# Altium PCB Routed BOARD 3.pcbdoc (part 4 of 7)
Units mil, origin at the board's own origin, x right, y up, seen from the top; angles counter-clockwise.
Board outline 6225 x 7025 mil, 8 copper layers (TopLayer, MidLayer1, MidLayer2, MidLayer3, MidLayer4, MidLayer5, MidLayer6, BottomLayer); 253 components, 548 nets, 2588 pads, 2014 vias.
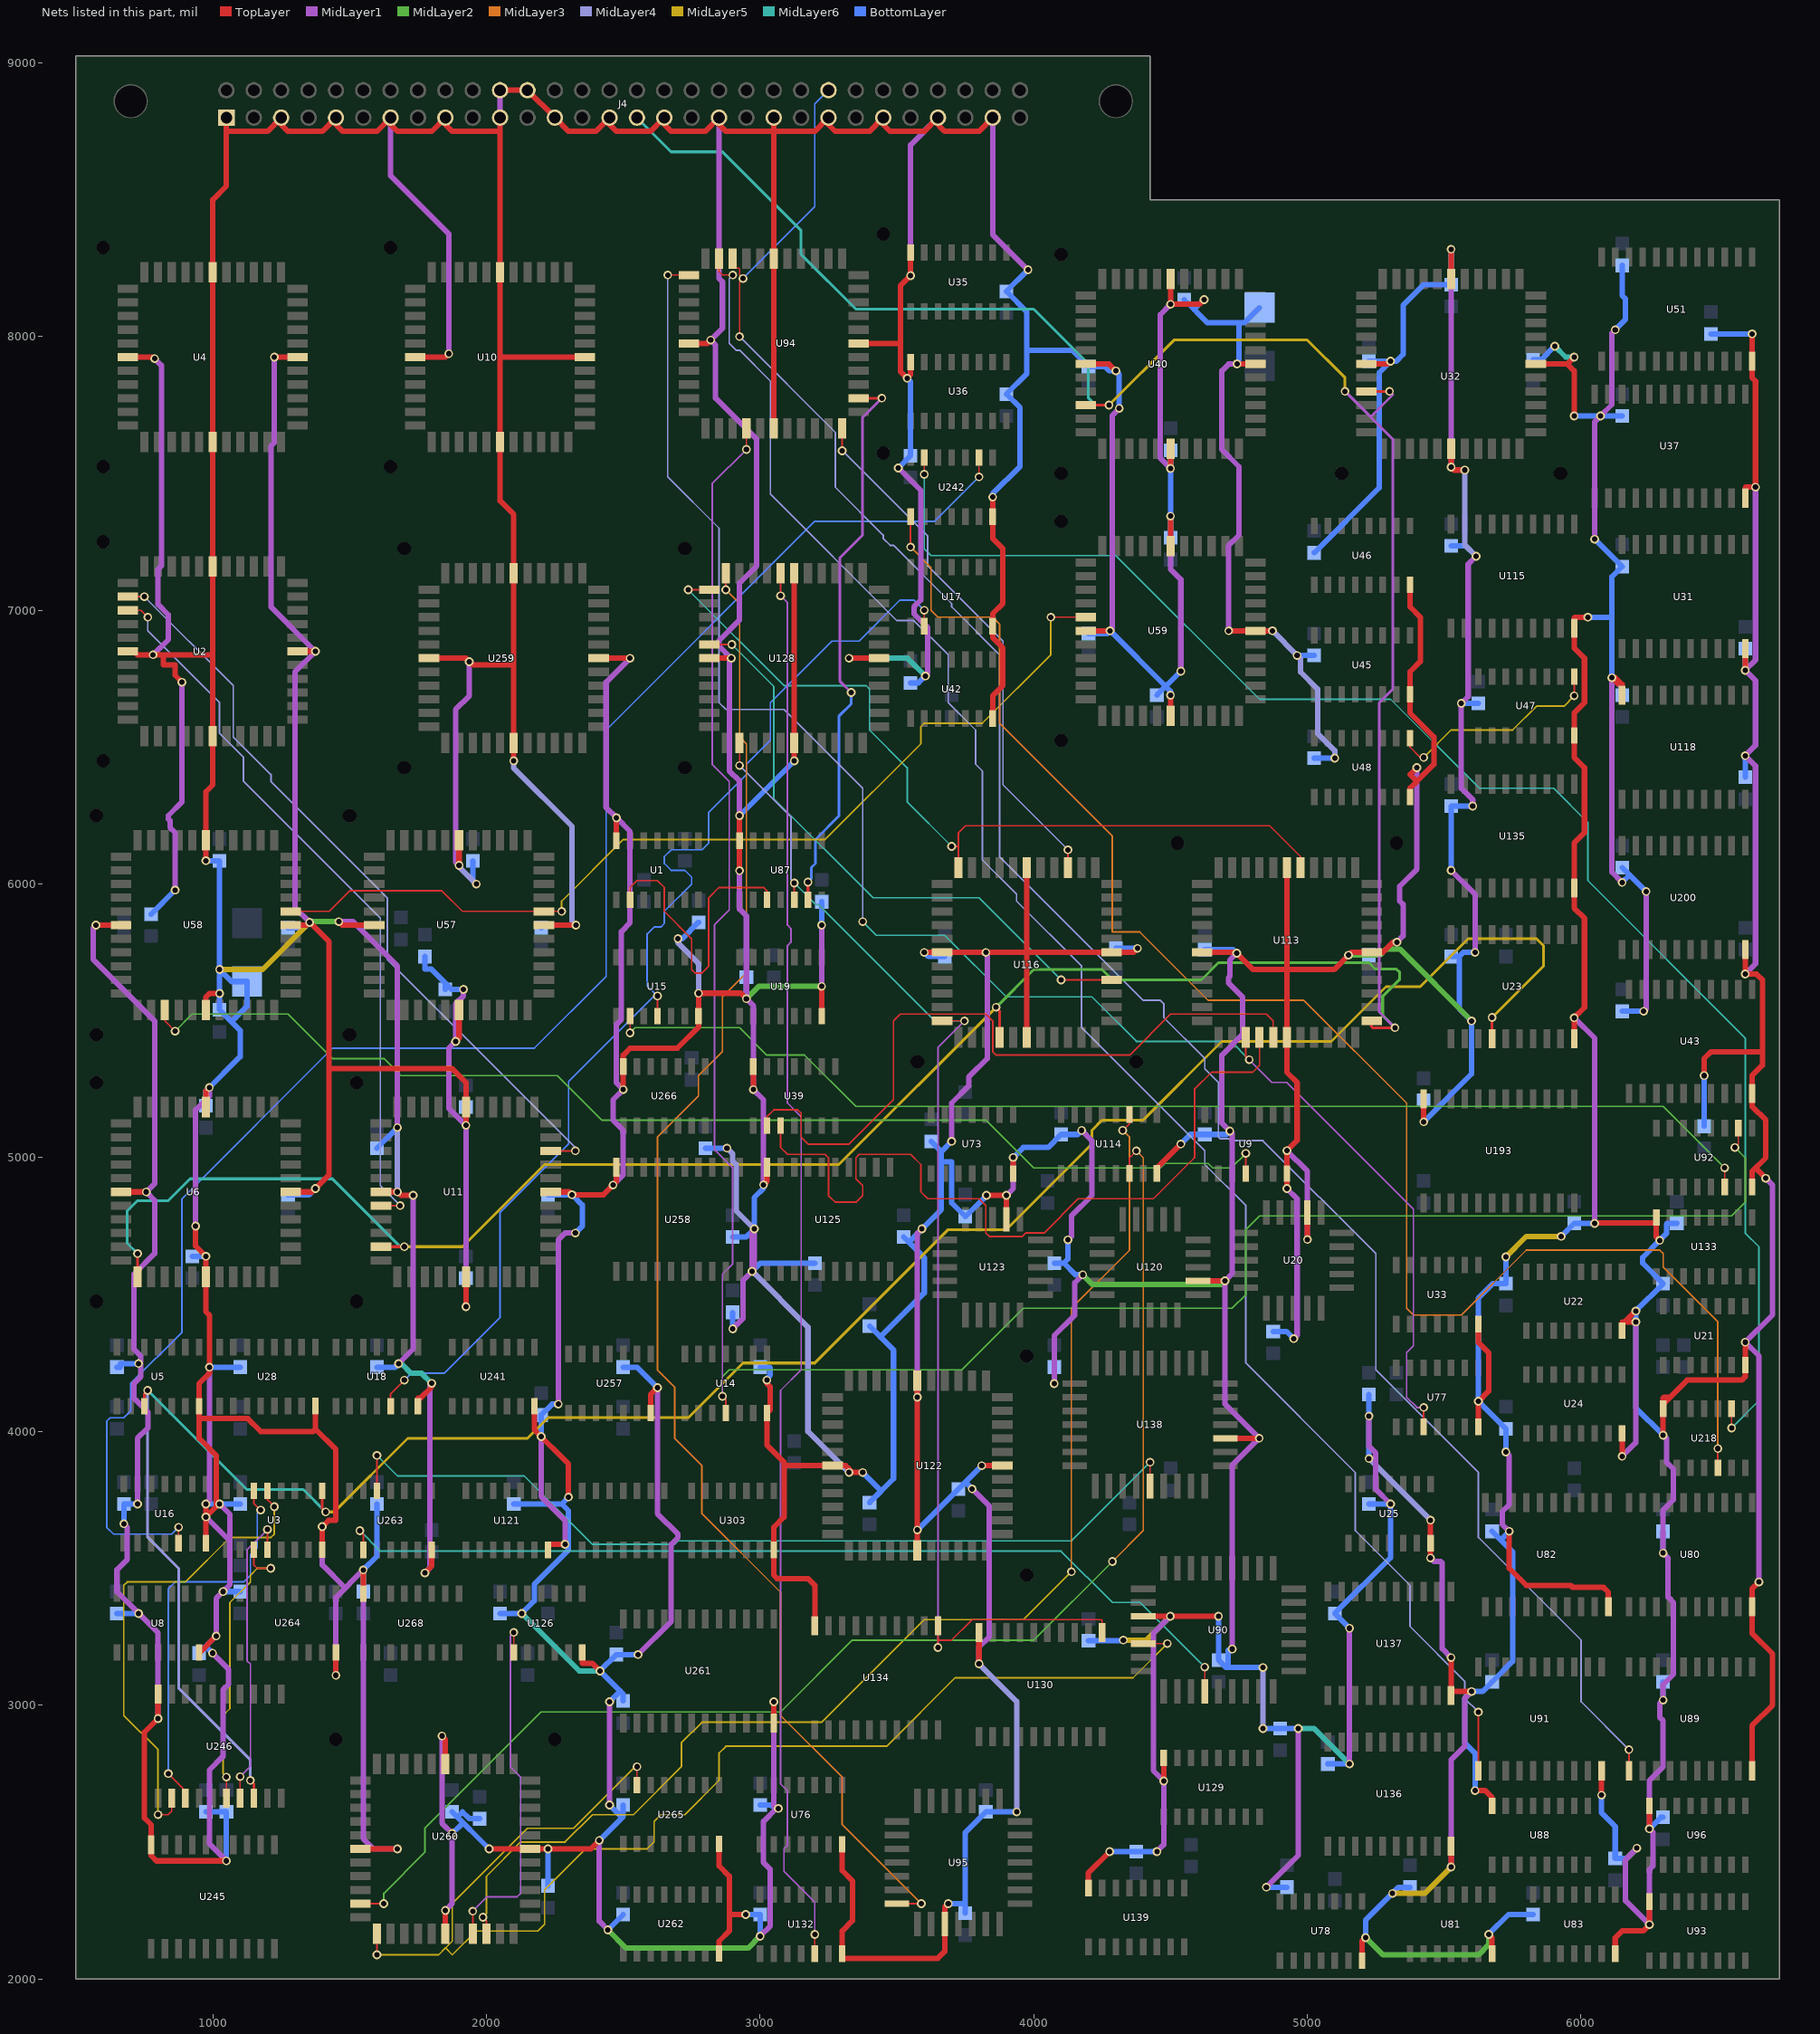
[diagram p10: the nets of this part, all layers, seen from the top]

## Via types
v1: diameter 32, hole 20, TopLayer to BottomLayer, 2014 vias

## Nets (pads, with @x,y where several pads share a name; then routed paths per layer and width w, separated by ;. In a path a pad name is that pad's centre, name@x,y a point inside that pad or via, vN(x,y) a via of type N, cw(c..) or ccw(c..) an arc to the next point about the centre after c; other vN are vias at no path point) (continued)
GND: C18.2 C27.2 C28.2 C29.2 C38.2 C39.2 C45.2 C46.2 C48.2 C50.2 C51.2 C53.2 C55.2 C57.2 C59.2 C60.2 C61.2 C67.2 C70.2 C73.2 C79.2 C80.2 C83.2 C85.2 C88.2 C90.2 C104.2 C106.2 C112.2 C119.2 C123.2 C124.2 C126.2 C127.2 C128.2 C130.2 C134.2 C140.2 C141.2 C143.2 C161.2 C163.2 C164.2 C165.2 C166.2 C167.2 C168.2 C170.2 C173.2 C180.2 C181.2 C186.2 C189.2 C191.2 C192.2 C193.2 C195.1 C196.2 C197.2 C198.2 C202.2 C205.2 C212.2 C213.2 C214.2 C216.2 C223.2 C225.2 C232.2 C241.2 C242.2 C244.2 C249.2 C250.2 C253.2 C254.2 C258.2 C261.2 C262.2 C264.2 C266.2 C267.1 C274.2 C280.2 C282.2 C287.2 C288.2 C291.2 C299.2 J4.1 J4.5 J4.9 J4.13 J4.17 J4.21 J4.22 J4.24 J4.25 J4.29 J4.33 J4.37 J4.41 J4.45 J4.49 J4.53 J4.57 R9.1 R10.1 R11.1 R12.1 R17.2 R30.1 R31.1 R32.1 R33.1 R34.2 R49.1 R62.1 R63.1 R66.1 R67.1 R75.1 R76.1 R77.1 R85.1 R87.1 R97.1 R109.1 R112.1 R115.1 R116.1 R121.1 R123.1 R279.1 R285.1 R288.1 R289.1 U1.7 U2.1 U2.12 U2.23 U2.34 U3.8 U4.1 U4.12 U4.23 U4.34 U5.7 U6.1 U6.12 U6.23 U6.34 U8.7 U9.7 U10.1 U10.12 U10.23 U10.34 U11.1 U11.12 U11.23 U11.34 U14.7 U15.7 U16.7 U17.7 U18.7 U19.7 U20.10 U21.7 U22.8 U23.10 U24.8 U25.7 U28.8 U31.10 U32.1 U32.12 U32.23 U32.34 U33.7 U35.8 U36.8 U37.12 U39.7 U40.1 U40.12 U40.23 U40.34 U42.7 U43.10 U45.8 U46.8 U47.8 U48.8 U51.12 U57.1 U57.12 U57.23 U57.34 U58.1 U58.12 U58.23 U58.34 U59.1 U59.12 U59.23 U59.34 U73.7 U76.7 U77.7 U78.7 U80.10 U81.7 U82.10 U83.7 U87.7 U88.8 U89.10 U90.16 U91.10 U92.8 U93.8 U94.1 U94.12 U94.23 U94.34 U95.14 U96.8 U113.1 U113.12 U113.23 U113.34 U114.8 U115.10 U116.1 U116.12 U116.23 U116.34 U118.10 U120.10 U121.7 U122.1 U122.12 U122.23 U122.34 U123.10 U125.10 U126.7 U128.1 U128.12 U128.23 U128.34 U129.8 U130.10 U132.7 U133.8 U134.10 U135.10 U136.10 U137.10 U138.16 U139.8 U193.12 U200.10 U218.7 U241.7 U242.7 U245.10 U246.10 U257.7 U258.10 U259.1 U259.12 U259.23 U259.34 U260.1 U260.12 U260.23 U260.34 U261.12 U262.8 U263.7 U264.8 U265.8 U266.7 U268.8 U303.7 | length 155108.6
  TopLayer w20: v1(573,5850) U58.34@665,5850 ; U4.34@690,7925 782,7925 v1(787.5,7919.5) ; v1(782,6837.5) U2.34@725,6837.5 ; v1(887.5,6737.5) 862.5,6762.5 862.5,6800 819.5,6800 819.5,6837.5 U2.34@725,6837.5 ; v1(937.5,4750) 937.5,4677.5 v1(975,4640) ; U8.7@950,3192 952,3192 v1(1012.5,3252.5) ; v1(975,3735) U16.7@975,3592 ; U6.23@975,5185 975,5244 v1(987.5,5256.5) ; U58.1@975,5540 975,5587.5 987.5,5600 v1(1025,5600) ; v1(975,6085) U58.23@975,6160 975,6337.5 1000,6362.5 U2.1@1000,6540 ; v1(1050,2431) 794,2431 775,2450 U245.10@775,2490 775,2562.5 750,2587.5 750,2901 v1(800,2951) ; v1(1225,7925) U4.12@1310,7925 ; v1(1375,4887.5) 1362.5,4875 ; U260.1@1540,2475 v1(1675,2475) ; U268.8@1550,3407 v1(1550,3494) ; v1(1732,4862.5) 1687.5,4862.5 v1(1675,4875) ; U10.34@1740,7925 1850,7925 v1(1862.5,7937.5) ; v1(1775,3483) 1800,3508 U263.7@1800,3567 ; v1(1837.5,2887.5) 1850,2875 U260.34@1850,2785 ; U260.12@1850,2165 v1(1850,2250) ; v1(1887.5,5425) 1900,5437.5 U57.1@1900,5540 ; v1(1925,5118.5) U11.23@1925,5185 1925,5275 1875,5325 1425,5325 1425,4937.5 ; v1(1937.5,6812.5) 1925,6825 ; v1(2010,2475) U260.23@2160,2475 ; J4.22@2050,8900 J4.24@2150,8900 J4.25@2250,8800 2300,8750 2400,8750 J4.29@2450,8800 2437.5,8787.5 2475,8750 2600,8750 J4.33@2650,8800 2637.5,8787.5 2675,8750 2800,8750 J4.37@2850,8800 2837.5,8787.5 2875,8750 3050,8750 ; v1(2100,6450) U259.1@2100,6515 ; v1(2200,3981) 2175,4006 ; v1(2225,2475) U260.23@2160,2475 ; U121.7@2225,3567 2225,3587.5 v1(2287.5,3587.5) ; v1(2300,3760) 2300,3881 2175,4006 ; U126.7@2350,3192 2350,3152.5 2387.5,3152.5 v1(2415,3125) ; U10.12@2360,7925 2050,7925 U10.1@2050,7615 ; U259.12@2410,6825 v1(2525,6825) ; v1(2412.5,2506) 2381.5,2475 U260.23@2160,2475 ; v1(2462.5,4900) 2475,4912.5 ; U257.7@2600,4067 2600,4135 v1(2625,4160) ; U265.8@2850,2493 2850,2412.5 2887.5,2375 2887.5,2175 ; v1(2925,6049) U87.7@2925,6158 ; v1(2947.5,2235) 2887.5,2235 2887.5,2175 ; v1(2950,5581) 2930,5601 v1(2775,5601) ; v1(3025,4187.5) 3025,4175 3037.5,4162.5 3037.5,4079.5 U14.7@3025,4067 ; U261.12@3050,2935 v1(3050,3012) ; U94.23@3050,7665 U94.1@3050,8285 J4.41@3050,8800 ; v1(3125,6450) U128.1@3125,6515 U128.23@3125,7135 ; U134.10@3200,3290 3200,3437.5 3175,3462.5 3062.5,3462.5 3050,3475 U303.7@3050,3567 3050,3650 3087.5,3687.5 3087.5,3887.5 ; U76.7@3300,2492 3300,2395.5 3337.5,2358 3337.5,2212.5 3300,2175 U132.7@3300,2092 3300,2075 3650,2075 3675,2100 U95.14@3675,2200 3675,2262.5 v1(3687.5,2275) ; v1(3325,3850) 3325,3862.5 3312.5,3875 ; v1(3325,6825) U128.12@3435,6825 ; U94.34@3360,7975 3512.5,7975 3512.5,7873 ; v1(3375,3850) 3337.5,3850 3312.5,3875 ; v1(3575,3640) U122.23@3575,3565 U122.1@3575,4185 v1(3575,4125) ; v1(3600,5750) U116.23@3665,5750 ; v1(3810,3875) U122.34@3885,3875 ; v1(3825,5750) U116.23@3665,5750 ; v1(3827.5,4862.5) v1(3900,4862.5) ; U42.7@3850,6604.5 3850,6687.5 3887.5,6725 3887.5,6862.5 3850,6900 U17.7@3850,6942 3850,6987.5 3887.5,7025 3887.5,7225 3850,7262.5 U242.7@3850,7342 v1(3850,7413.5) ; J4.57@3850,8800 3800,8750 3675,8750 3637.5,8787.5 J4.53@3650,8800 3600,8750 3475,8750 3437.5,8787.5 J4.49@3450,8800 3400,8750 3275,8750 3237.5,8787.5 J4.45@3250,8800 3200,8750 3050,8750 ; U116.34@3975,5440 3975,5750 ; U116.12@3975,6060 3975,5750 ; U59.34@4190,6925 v1(4279,6925) ; U40.34@4190,7900 4275,7900 v1(4300,7875) ; U139.8@4200,2332 4200,2387.5 v1(4277.5,2465) ; v1(4379,5765) 4364,5750 U116.1@4285,5750 ; U114.8@4450,4943 4450,4962.5 v1(4537.5,5050) ; U59.1@4500,6615 v1(4500,6690) ; U59.23@4500,7235 v1(4500,7344) ; v1(4500,7518.5) U40.1@4500,7590 ; v1(4622.5,8135) 4605.5,8118 v1(4500,8118) ; v1(4675,3325) U90.16@4400,3325 ; v1(4712.5,6925) U59.12@4810,6925 v1(4872.5,6925) ; v1(4925,4887.5) U9.7@4925,4942 ; U113.34@4925,6060 U113.12@4925,5440 ; v1(5000,4701) U20.10@5000,4800 ; v1(5150,5740) v1@5160,5750 ; v1(5327,5787.5) 5312.5,5787.5 5275,5750 U113.23@5235,5750 ; U46.8@5375,7093 5375,7012.5 5412.5,6975 5412.5,6812.5 5375,6775 U45.8@5375,6693 5375,6625 5462.5,6537.5 5462.5,6437.5 5375,6350 ; v1(5400,6425) 5375,6400 5400,6375 5375,6350 ; v1(5450,3537.5) U25.7@5450,3592 v1(5450,3676) ; v1(5525,3174) U137.10@5525,3035 ; U32.12@5525,8210 v1(5525,8319) ; v1(5575,7512.5) 5535.5,7512.5 v1(5525,7523) ; v1(5612.5,2687.5) 5650,2687.5 5675,2662.5 U88.8@5675,2632 ; U33.7@5625,4392 5625,4325 5662.5,4287.5 5662.5,4147.5 v1(5625,4110) ; v1(5662.5,2162.5) 5675,2150 U81.7@5675,2092 ; v1(5737.5,3635) 5737.5,3500 5800,3437.5 5962.5,3437.5 5969.5,3430.5 6082,3430.5 6100,3412.5 U82.10@6100,3360 ; v1(5975,7710) 5975,7875 5950,7900 ; v1(5975,7925) 5950,7900 ; v1(6025,6975) 5977.5,6975 5975,6972.5 U115.10@5975,6935 5975,6862.5 6012.5,6825 6012.5,6662.5 5975,6625 U47.8@5975,6543 5975,6462.5 6012.5,6425 6012.5,6187.5 5975,6150 U135.10@5975,5985 5975,5912.5 6012.5,5875 6012.5,5549 v1(5975,5511.5) ; v1(6050,4760) 6052.5,4762.5 6275,4762.5 U133.8@6275,4782 ; v1(6075,2671) U91.10@6075,2760 ; U83.7@6125,2092 6125,2150 6150,2175 6227,2175 v1(6250,2198) ; v1(6150,3909) U24.8@6150,3993 ; v1(6200,4400) 6150,4400 ; v1(6200,4440) 6160,4400 6150,4400 ; v1(6450,5300) 6450,5362.5 6475,5387.5 6662.5,5387.5 6662.5,5337.5 ; v1(6600,6781) U31.10@6600,6860 ; U89.10@6625,2760 6625,2925 6700,3000 6700,3187.5 6625,3262.5 U80.10@6625,3360 6625,3425 v1(6650,3450) ; v1(6625,8010) U51.12@6625,7910 6625,7850 6637.5,7837.5 v1(6637.5,7450) ; v1(6675,4925) 6637.5,4962.5 6625,4950 ; U2.34@690,6850 U2.34@712.5,6850 ; U2.34@690,6850 U2.34@712.5,6850 ; U2.34@690,6850 U2.34@712.5,6850 ; U2.34@712.5,6850 U2.34@725,6837.5 ; U2.34@712.5,6850 U2.34@725,6837.5 ; U2.34@712.5,6850 U2.34@725,6837.5 ; U2.34@725,6837.5 1000,6837.5 U2.1@1000,6540 ; v1(800,2951) U246.10@800,3040 v1(800,2951) ; U5.7@950,4092 950,4047 1128,4047 1175,4000 1366,4000 1375,4009 ; U5.7@950,4092 950,3975 1012.5,3912.5 1012.5,3725 v1(975,3687.5) ; U5.7@950,4092 950,4175 987.5,4212.5 987.5,4425 975,4437.5 U6.1@975,4565 ; U16.7@975,3592 v1(975,3687.5) ; U16.7@975,3592 v1(975,3687.5) ; U6.1@975,4565 v1(975,4640) ; U6.1@975,4565 v1(975,4640) ; U2.1@1000,6540 U2.23@1000,7160 U4.1@1000,7615 U4.23@1000,8235 1000,8500 1050,8550 J4.1@1050,8800 1050,8750 1200,8750 J4.5@1250,8800 1237.5,8787.5 1275,8750 1400,8750 J4.9@1450,8800 1437.5,8787.5 1475,8750 1600,8750 J4.13@1650,8800 1637.5,8787.5 1675,8750 1800,8750 J4.17@1850,8800 1837.5,8787.5 1875,8750 2050,8750 J4.21@2050,8800 U10.23@2050,8235 U10.1@2050,7615 ; U6.12@1285,4875 1362.5,4875 ; U6.12@1285,4875 1362.5,4875 ; U6.12@1285,4875 1362.5,4875 ; v1@1344,5850 v1(1354,5860) ; v1@1344,5850 U58.12@1285,5850 v1@1344,5850 ; v1@1344,5850 v1(1354,5860) ; v1(1354,5860) 1425,5789 1425,4937.5 ; 1362.5,4875 1425,4937.5 ; 1362.5,4875 1425,4937.5 ; 1375,4009 U28.8@1375,4093 1375,4009 ; 1375,4009 1450,3934 1450,3675 1423,3675 v1(1400,3652) ; v1(1400,3652) U3.8@1400,3568 v1(1400,3652) ; 1473,5850 U57.34@1590,5850 1473,5850 ; 1473,5850 v1(1460.5,5862.5) 1473,5850 ; v1(1675,4875) U11.34@1615,4875 v1(1675,4875) ; 1750,4122.5 1760,4122.5 ; 1750,4122.5 U18.7@1750,4092 1750,4122.5 ; 1750,4122.5 1760,4122.5 ; 1760,4122.5 v1@1800,4162.5 ; 1760,4122.5 v1@1800,4162.5 ; v1@1800,4162.5 v1(1800,4176) v1@1800,4162.5 ; 1925,6825 U259.34@1790,6825 1925,6825 ; 1925,6825 1950,6800 2100,6800 U259.1@2100,6515 ; U10.1@2050,7615 2050,7400 2100,7350 U259.23@2100,7135 U259.1@2100,6515 ; 2175,4006 U241.7@2175,4092 2175,4006 ; v1@2302.5,4875 U11.12@2235,4875 v1@2302.5,4875 ; v1@2302.5,4875 v1(2312.5,4865) ; v1@2302.5,4875 v1(2312.5,4865) ; v1(2312.5,4865) 2427.5,4865 2475,4912.5 ; 2475,4912.5 U258.10@2475,4965 2475,4912.5 ; U266.7@2500,5333 v1(2500,5249) U266.7@2500,5333 ; U266.7@2500,5333 2500,5375 2525,5400 2697.5,5400 2775,5477.5 U15.7@2775,5517 ; U15.7@2775,5517 v1(2775,5601) ; U15.7@2775,5517 v1(2775,5601) ; 2807,7975 U94.12@2740,7975 2807,7975 ; 2807,7975 v1(2819.5,7987.5) 2807,7975 ; 2850,2137.5 U262.8@2850,2093 2850,2137.5 ; 2850,2137.5 2887.5,2175 ; 2850,2137.5 2887.5,2175 ; U87.7@2925,6158 v1(2925,6250) U87.7@2925,6158 ; 3025,3950 3087.5,3887.5 ; 3025,3950 U14.7@3025,4067 ; 3025,3950 U14.7@3025,4067 ; 3025,3950 3087.5,3887.5 ; 3025,4913.5 U125.10@3025,4965 3025,4913.5 ; 3025,4913.5 v1(3012.5,4901) 3025,4913.5 ; 3050,8750 J4.41@3050,8800 ; 3050,8750 J4.41@3050,8800 ; 3087.5,3887.5 3087.5,3875 U122.12@3265,3875 ; U122.12@3265,3875 3312.5,3875 ; U122.12@3265,3875 3312.5,3875 ; 3512.5,7873 3512.5,8185.5 v1(3550,8223) ; 3512.5,7873 v1(3537.5,7848) ; 3512.5,7873 v1(3537.5,7848) ; v1(3537.5,7848) 3550,7860.5 ; v1(3537.5,7848) 3550,7860.5 ; v1(3537.5,7848) 3550,7860.5 ; 3550,7860.5 U36.8@3550,7907 ; 3550,7860.5 U36.8@3550,7907 ; 3550,7860.5 U36.8@3550,7907 ; v1(3550,8223) U35.8@3550,8307 v1(3550,8223) ; U116.23@3665,5750 3975,5750 ; U116.23@3665,5750 U116.1@4285,5750 ; v1(3900,4862.5) U123.10@3900,4775 v1(3900,4862.5) ; 3975,5750 U116.1@4285,5750 ; U90.16@4400,3325 v1(4499,3325) U90.16@4400,3325 ; v1(4500,8118) U40.23@4500,8210 v1(4500,8118) ; U120.10@4600,4550 v1(4699,4550) ; U120.10@4600,4550 v1(4699,4550) ; U120.10@4600,4550 v1(4699,4550) ; U113.1@4615,5750 v1@4739,5750 ; U113.1@4615,5750 v1@4739,5750 ; U113.1@4615,5750 v1@4739,5750 ; v1@4739,5750 4801.5,5687.5 4925,5687.5 ; v1@4739,5750 v1(4741.5,5747.5) v1@4739,5750 ; U9.7@4925,4942 v1(4925,5026) ; U9.7@4925,4942 v1(4925,5026) ; v1(4925,5026) 4962.5,5063.5 4962.5,5275 4925,5312.5 U113.12@4925,5440 ; U113.12@4925,5440 4925,5687.5 ; U113.12@4925,5440 4925,5687.5 ; 4925,5687.5 5097.5,5687.5 v1@5160,5750 ; v1@5160,5750 U113.23@5235,5750 ; v1@5160,5750 U113.23@5235,5750 ; 5200,2138.5 U78.7@5200,2067 5200,2138.5 ; 5200,2138.5 v1(5212.5,2151) 5200,2138.5 ; U32.23@5215,7900 v1@5294,7900 ; U32.23@5215,7900 v1@5294,7900 ; U32.23@5215,7900 v1@5294,7900 ; v1@5294,7900 v1(5304,7910) ; v1@5294,7900 v1(5304,7910) ; v1@5294,7900 v1(5304,7910) ; 5375,6350 U48.8@5375,6318 5375,6350 ; v1(5425,5131) U193.12@5425,5215 ; v1(5425,5131) U193.12@5425,5215 ; v1(5425,5131) U193.12@5425,5215 ; U137.10@5525,3035 U137.10@5525,3050 ; U137.10@5525,3035 U137.10@5525,3050 ; U137.10@5525,3050 v1(5600,3050) U137.10@5525,3050 ; v1(5525,7523) U32.34@5525,7590 v1(5525,7523) ; v1(5625,4110) U77.7@5625,4017 v1(5625,4110) ; 5950,7900 U32.1@5835,7900 5950,7900 ; U23.10@5975,5435 v1(5975,5511.5) ; U23.10@5975,5435 v1(5975,5511.5) ; U23.10@5975,5435 v1(5975,5511.5) ; 6150,4400 U22.8@6150,4368 6150,4400 ; 6150,6729 U118.10@6150,6690 6150,6729 ; 6150,6729 6137.5,6729 v1(6112.5,6754) 6125,6754 6150,6729 ; v1(6250,2198) U93.8@6250,2282 ; v1(6250,2198) U93.8@6250,2282 ; v1(6250,2198) U93.8@6250,2282 ; v1(6250,2548) U96.8@6250,2632 ; v1(6250,2548) U96.8@6250,2632 ; v1(6250,2548) U96.8@6250,2632 ; 6275,4710.5 U133.8@6275,4782 ; 6275,4710.5 v1(6287.5,4698) 6275,4710.5 ; 6275,4710.5 U133.8@6275,4782 ; U218.7@6300,4083 6300,4122.5 ; U218.7@6300,4083 6300,4122.5 ; U218.7@6300,4083 6300,4122.5 ; U218.7@6300,4100 v1(6300,3986.5) U218.7@6300,4100 ; U218.7@6300,4100 6325,4125 ; U218.7@6300,4100 6325,4125 ; 6300,4122.5 6302.5,4125 ; 6300,4122.5 6302.5,4125 ; 6300,4122.5 6302.5,4125 ; 6302.5,4125 6325,4125 ; 6302.5,4125 6325,4125 ; 6302.5,4125 6325,4125 ; 6325,4125 6387.5,4187.5 6587.5,4187.5 6600,4200 U21.7@6600,4242 ; U21.7@6600,4242 v1(6600,4326) U21.7@6600,4242 ; v1(6600,5671) 6641.5,5671 6662.5,5650 6662.5,5337.5 ; v1(6600,5671) U200.10@6600,5760 v1(6600,5671) ; 6600,7447.5 6602.5,7450 ; 6600,7447.5 U37.12@6600,7410 6600,7447.5 ; 6600,7447.5 6602.5,7450 ; 6602.5,7450 v1(6637.5,7450) ; 6602.5,7450 v1(6637.5,7450) ; 6625,4950 U92.8@6625,4893 6625,4950 ; 6625,4950 6675,5000 6675,5137.5 6625,5187.5 U43.10@6625,5235 ; U43.10@6625,5235 6625,5300 ; U43.10@6625,5235 6625,5300 ; 6625,5300 6662.5,5337.5 ; 6625,5300 6662.5,5337.5 ; U6.34@665,4875 v1(757,4875) U6.34@665,4875 ; U2.12@1310,6850 v1(1375,6850) U2.12@1310,6850 ; v1(1450,3109) U264.8@1450,3193 v1(1450,3109) ; v1(1900,6068) U57.23@1900,6160 v1(1900,6068) ; v1(1925,4456) U11.1@1925,4565 v1(1925,4456) ; U57.12@2210,5850 v1(2327,5850) U57.12@2210,5850 ; U1.7@2475,6158 v1(2475,6242) U1.7@2475,6158 ; U128.34@2815,6825 v1(2894.5,6825) U128.34@2815,6825 ; v1(2975,5249) U39.7@2975,5333 v1(2975,5249) ; U19.7@3225,5517 v1(3225,5626) U19.7@3225,5517 ; v1(3800,3151) U130.10@3800,3265 v1(3800,3151) ; U73.7@3925,4942 v1(3925,5001) U73.7@3925,4942 ; v1(4475,2723) U129.8@4475,2807 v1(4475,2723) ; U138.16@4700,3975 v1(4824,3975) U138.16@4700,3975 ; v1(4743,7900) U40.12@4810,7900 v1(4743,7900) ; v1(5525,2408.5) U136.10@5525,2485 v1(5525,2408.5)
  MidLayer1 w20: v1(573,5850) 562.5,5839.5 562.5,5725 787.5,5500 787.5,4905.5 v1(757,4875) 787.5,4844.5 787.5,4650 712.5,4575 712.5,4300 737.5,4275 737.5,4256.5 v1(729,4248) 735,4248 737.5,4245.5 737.5,4200 712.5,4175 712.5,4121 762.5,4071 762.5,4012.5 725,3975 v1(725,3735) ; v1(675,3662.5) 687.5,3650 687.5,3532 650,3494.5 650,3414 v1(729,3335) 800,3264 v1(800,2951) ; v1(782,6837.5) 837.5,6893 837.5,6983.5 800,7021 800,7150 812.5,7162.5 812.5,7894.5 v1(787.5,7919.5) ; v1(862.5,5977.5) 862.5,6187.5 843.5,6206.5 843.5,6231 837.5,6237 837.5,6250 887.5,6300 v1(887.5,6737.5) ; v1(937.5,4750) 937.5,5175 987.5,5225 v1(987.5,5256.5) ; v1(975,3687.5) 1062.5,3600 1062.5,3440 ; v1(975,3735) 987.5,3747.5 v1(987.5,4235) ; v1(999,3190) 1057,3132 1057,3075 1037.5,3055.5 1037.5,2812.5 987.5,2762.5 987.5,2493.5 v1(1050,2431) ; v1(1012.5,3252.5) 1012.5,3390 1062.5,3440 ; v1(1025,3735) 1062.5,3697.5 1062.5,3440 ; v1(1037.5,3415) 1062.5,3440 ; v1(1225,7925) 1225,7612.5 1212.5,7600 1212.5,7012.5 v1(1375,6850) 1300,6775 1300,5914 v1(1354,5860) ; v1(1400,3652) 1400,3512.5 1484.25,3428.25 1450,3394 ; v1(1460.5,5862.5) 1512.5,5862.5 1675,5700 v1(1675,5110) ; J4.13@1650,8800 1650,8587.5 1862.5,8375 v1(1862.5,7937.5) ; v1(1675,2475) 1587.5,2475 1550,2512.5 v1(1550,3494) 1450,3394 ; v1(1679,4247.5) 1732,4300.5 v1(1732,4862.5) ; v1(1775,3483) 1794,3502 1794,4170 v1(1800,4176) ; v1(1837.5,2887.5) 1837.5,2568.5 v1(1875,2531) 1875,2275 v1(1850,2250) ; v1(1900,6068) 1887.5,6080.5 1887.5,6637.5 1937.5,6687.5 v1(1937.5,6812.5) ; v1(1925,4456) v1(1925,5118.5) 1862.5,5181 1862.5,5400 v1(1887.5,5425) ; J4.21@2050,8800 J4.22@2050,8900 ; v1(2200,3981) 2200,3762.5 2287.5,3675 v1(2287.5,3587.5) ; v1(2262.5,4100) 2262.5,4700 2287.5,4725 v1(2325,4725) ; v1(2412.5,2506) 2412.5,2210.5 v1(2444,2179) ; v1(2450,2635) v1(2450,3012.5) ; v1(2462.5,4900) 2500,4937.5 2500,5100 2462.5,5137.5 2462.5,5211.5 v1(2500,5249) 2475,5274 2475,5487.5 2493,5505.5 2493,5826.5 2525,5858.5 2525,6192 v1(2475,6242) 2437.5,6279.5 2437.5,6737.5 v1(2525,6825) ; v1(2554,3185) 2675,3306 2675,3587.5 2700,3612.5 2700,3625 2625,3700 v1(2625,4160) ; J4.37@2850,8800 2850,8212.5 2862.5,8200 2862.5,8030.5 v1(2819.5,7987.5) 2837.5,7969.5 2837.5,7775 2987.5,7625 2987.5,7162.5 2925,7100 2925,6964.5 2850,6889.5 2850,6869.5 v1(2894.5,6825) 2887.5,6818 2887.5,6413.5 2925,6376 v1(2925,6250) ; v1(2900,4375) 2937.5,4412.5 2937.5,4551.5 2979,4593 v1(2979,4740) 2971,4732 v1(2971,4585) ; v1(2925,6049) 2925,5908.5 2950,5883.5 v1(2950,5581) 2975,5556 v1(2975,5249) 3012.5,5211.5 v1(3012.5,4901) ; v1(3000,2156) 3037.5,2193.5 3037.5,2400 3012.5,2425 3012.5,2575 v1@3060,2622.5 ; v1(3050,3012) 3050,2632.5 v1@3060,2622.5 ; v1(3225,5626) v1(3225,5850) ; v1(3505,7520) 3587.5,7437.5 3587.5,7037.5 3562.5,7012.5 3562.5,6987.5 3612.5,6937.5 3612.5,6768.5 v1(3604,6760) ; v1(3550,8223) 3550,8700 J4.53@3650,8800 ; v1(3575,4125) 3575,4723.5 v1(3591.5,4740) ; v1(3700,5060) 3700,5200 3762.5,5262.5 3762.5,5294.5 3830.5,5362.5 3830.5,5744.5 v1(3825,5750) ; v1(3775,3790) 3837.5,3727.5 3837.5,3250 3800,3212.5 v1(3800,3151) ; J4.57@3850,8800 3850,8373 v1(3979,8244) ; v1(3900,4862.5) 3925,4887.5 v1(3925,5001) ; v1(4075,4175) 4075,4350 4150,4425 4150,4543.5 v1(4179,4572.5) ; v1(4125,4700) 4137.5,4712.5 4137.5,4787.5 4212.5,4862.5 4212.5,5062.5 v1(4175,5100) ; v1(4279,6925) 4287.5,6933.5 4287.5,7712.5 v1(4312.5,7737.5) ; v1(4450,2465) 4475,2490 v1(4475,2723) 4437.5,2760.5 4437.5,3263.5 v1(4499,3325) ; v1(4500,7344) 4500,7150 4537.5,7112.5 v1(4537.5,6777.5) ; v1(4500,7518.5) 4462.5,7556 4462.5,8080.5 v1(4500,8118) ; v1(4712.5,6925) 4712.5,7237.5 4750,7275 4750,7525 4687.5,7587.5 4687.5,7875 4712.5,7900 v1(4743,7900) ; v1(4725,3205) 4725,3876 v1(4824,3975) 4699,4100 v1(4699,4550) 4725,4576 4725,5089 v1(4716.5,5097.5) 4687.5,5126.5 4687.5,5375 4762.5,5450 4762.5,5587.5 4712.5,5637.5 4712.5,5658.5 4716.5,5662.5 4716.5,5722.5 v1(4741.5,5747.5) ; v1(4850,2335) 4966.5,2451.5 v1(4966.5,2915) ; v1(4925,4887.5) 4962.5,4850 4962.5,4351.5 v1(4950,4339) ; v1(4925,5026) 5000,4951 v1(5000,4701) ; v1(5154,2785) v1(5154,3281) ; v1(5225,4056) 5225,3945.5 5250,3920.5 5250,3789 v1(5304,3735) ; v1(5327,5787.5) 5350,5810.5 5350,5925 5337.5,5937.5 5337.5,5992 5400,6054.5 v1(5400,6425) ; v1(5450,3537.5) 5462.5,3525 5487.5,3525 5493,3519.5 5493,3206 v1(5525,3174) ; v1(5525,2408.5) 5525,2800 5575,2850 5575,3025 v1(5600,3050) ; v1(5525,6050) 5612.5,5962.5 v1(5612.5,5750) ; v1(5525,7523) v1(5525,8319) ; v1(5616.5,7197.5) 5587.5,7168.5 5587.5,6685 v1(5562.5,6660) ; v1(5725,3925) 5737.5,3912.5 5737.5,3732 5712.5,3707 5712.5,3660 v1(5737.5,3635) ; v1(6050,7260) 6050,7689 v1(6071,7710) 6112.5,7751.5 6112.5,8012.5 v1(6125,8025) ; v1(6112.5,6754) 6112.5,6043.5 v1(6150,6006) ; v1(6150,3909) 6200,3959 v1(6200,4400) ; v1(6204,2477.5) 6162.5,2436 6162.5,2285.5 v1(6250,2198) 6250,2400 6262.5,2412.5 6262.5,2535.5 v1(6250,2548) 6250,2725 6300,2775 6300,2943 6287.5,2955.5 6287.5,3006 v1(6300,3018.5) 6300,3075 6337.5,3112.5 6337.5,3375 6318,3394.5 6318,3538 v1(6300,3556) 6300,3712.5 6337.5,3750 6337.5,3862.5 6312.5,3887.5 6312.5,3974 v1(6300,3986.5) ; v1(6229,5535) 6237.5,5543.5 v1(6237.5,5972.5) ; v1(6600,5671) 6637.5,5708.5 6637.5,6431.5 v1(6600,6469) 6637.5,6506.5 6637.5,6743.5 v1(6600,6781) 6637.5,6818.5 v1(6637.5,7450) ; v1(6650,3450) 6650,4276 v1(6600,4326) 6700,4426 6700,4900 v1(6675,4925) ; 1450,3394 v1(1450,3109) 1450,3394 ; v1(1887.5,5425) 1887.5,5562.5 ; v1(1887.5,5425) 1887.5,5562.5 ; 1887.5,5562.5 1916.5,5591.5 ; 1887.5,5562.5 1916.5,5591.5 ; 1916.5,5591.5 v1(1916.5,5615) 1916.5,5591.5 ; v1@3060,2622.5 v1(3066.5,2622.5) v1@3060,2622.5 ; 5562.5,6350 v1(5562.5,6660) ; 5562.5,6350 5604,6308.5 ; 5562.5,6350 v1(5562.5,6660) ; 5562.5,6350 5604,6308.5 ; 5604,6308.5 v1(5604,6285) 5604,6308.5 ; 6050,5436.5 v1(6050,4760) 6050,5436.5 ; 6050,5436.5 v1(5975,5511.5) 6050,5436.5
  MidLayer2 w20: v1(1354,5860) 1356.5,5862.5 v1(1460.5,5862.5) ; v1(2444,2179) 2510.5,2112.5 2956.5,2112.5 v1(3000,2156) ; v1(2950,5581) 2995,5626 v1(3225,5626) ; v1(4179,4572.5) 4214,4537.5 4686.5,4537.5 v1(4699,4550) ; v1(5150,5740) 5265,5740 5287.5,5762.5 5337.5,5762.5 v1(5600,5500) ; v1(5212.5,2151) 5276,2087.5 5625,2087.5 5662.5,2125 v1(5662.5,2162.5)
  MidLayer4 w20: v1(1675,4875) v1(1675,5110) ; v1(1900,6068) 1900,6063 v1(1963,6000) ; v1(2100,6450) 2100,6423 2312.5,6210.5 2312.5,5864.5 v1(2327,5850) ; v1(2700,5800) 2700,5785 2775,5710 v1(2775,5601) ; v1(2879,5035) 2900,5014 2900,4987.5 2912.5,4975 2912.5,4806.5 v1(2979,4740) ; v1(2971,4585) 3175,4381 3175,4000 v1(3325,3850) ; v1(3800,3151) 3937.5,3013.5 v1(3937.5,2610) ; v1(4837.5,2915) v1(4837.5,3137.5) ; v1(4872.5,6925) v1(4962.5,6835) 4975,6822.5 4975,6775 5037.5,6712.5 5037.5,6550 5100,6487.5 v1(5100,6460) ; v1(5225,3901) v1(5450,3676) ; v1(5575,7512.5) 5575,7239 v1(5616.5,7197.5)
  MidLayer5 w20: v1(1025,5687.5) 1181.5,5687.5 v1(1354,5860) ; v1(4327.5,3237.5) 4411.5,3237.5 v1(4499,3325) ; v1(5311,2312.5) 5429,2312.5 v1(5525,2408.5) ; v1(5725,4637.5) 5800,4712.5 v1(5927.5,4712.5)
  MidLayer6 w20: v1(1679,4247.5) 1690,4247.5 1725,4212.5 1763.5,4212.5 v1(1800,4176) ; v1(2129,3335) 2339,3125 v1(2415,3125) ; v1(3325,6825) 3539,6825 v1(3604,6760) ; v1(4966.5,2915) 5024,2915 v1(5154,2785) ; v1(5904,7965) 5944,7925 v1(5975,7925)
  BottomLayer w20: v1(675,3662.5) C45.2@675,3735 v1(725,3735) ; R33.1@775,5890 v1(862.5,5977.5) ; C168.2@925,4640 v1(975,4640) ; R10.1@975,2610 C202.2@1050,2610 ; v1(975,6085) C128.2@1025,6085 C232.2@1025,5540 ; v1(987.5,4235) C140.2@1100,4235 ; v1(999,3190) 974.5,3214.5 R279.1@950,3190 ; v1(1025,3735) C80.2@1100,3735 ; v1(1025,5600) C232.2@1025,5540 ; v1(1025,5687.5) 1068.5,5644 C267.1@1125,5644 1125,5552.5 1068.75,5496.25 C232.2@1025,5540 ; v1(1037.5,3415) C288.2@1100,3415 ; R9.1@1275,4865 1352.5,4865 v1(1375,4887.5) ; C141.2@1600,3735 1600,3544 v1(1550,3494) ; R32.1@1775,5735 1775,5690 1797.5,5690 C119.2@1850,5637.5 ; v1(1925,4456) C67.2@1925,4560 ; C249.2@1950,6085 1950,6013 v1(1963,6000) ; R288.1@1975,2585 1937.5,2585 1912.5,2610 1893.75,2591.25 R31.1@1875,2610 ; v1(2010,2475) R31.1@1875,2610 ; R76.1@2200,5840 2210,5850 v1(2327,5850) ; C79.2@2225,2340 v1(2225,2475) ; v1(2262.5,4100) 2240,4100 C241.2@2200,4060 ; v1(2300,3760) 2275,3735 ; v1(2325,4725) 2350,4750 2350,4827.5 v1(2312.5,4865) ; v1(2450,2635) 2495.75,2589.25 2500,2593.5 ; v1(2450,3012.5) 2488.75,3051.25 2500,3040 ; v1(2554,3185) C134.2@2475,3185 ; v1(2700,5800) 2715,5800 C18.2@2775,5860 ; C167.2@2800,5035 v1(2879,5035) ; v1(2900,4375) C205.2@2900,4435 ; v1(2925,6250) v1(3125,6450) ; v1(2947.5,2235) C287.2@3000,2235 ; C28.2@3000,4235 3035,4235 3037.5,4232.5 3037.5,4206 3025,4193.5 v1(3025,4187.5) ; v1(3012.5,4901) 3012.5,4888.5 2979,4855 v1(2979,4740) ; v1(3225,5850) C282.2@3225,5935 ; v1(3375,3850) 3442.5,3782.5 R115.1@3400,3740 3487.5,3827.5 3487.5,4297.5 C29.2@3400,4385 3439.5,4345.5 3600,4506 3600,4635 R116.1@3525,4710 ; v1(3505,7520) C262.2@3550,7565 3550,7835.5 v1(3537.5,7848) ; v1(3575,3640) C59.2@3725,3790 ; v1(3591.5,4740) R116.1@3543.25,4691.75 ; v1(3600,5750) 3615,5735 C198.2@3675,5735 ; v1(3687.5,2275) 3750,2275 R97.1@3750,2240 3750,2535 C197.2@3825,2610 v1(3937.5,2610) ; v1(3700,5060) 3662.5,5022.5 ; v1(3775,3790) 3750,3815 C59.2@3725,3790 ; v1(3810,3875) C59.2@3725,3790 ; v1(3827.5,4862.5) R49.1@3750,4785 3700,4835 3700,4985 3662.5,4985 3662.5,5022.5 ; v1(3850,7413.5) 3850,7426 3950,7526 3950,7740 C124.2@3900,7790 3975,7865 3975,8090 ; v1(3925,5001) 3961.5,5037.5 4052.5,5037.5 C192.2@4100,5085 4160,5085 v1(4175,5100) ; v1(3979,8244) C123.2@3900,8165 ; v1(4075,4175) C250.2@4075,4235 ; v1(4125,4700) 4125,4630 4110,4615 ; C57.2@4200,3235 4325,3235 v1(4327.5,3237.5) ; v1(4277.5,2465) R121.1@4375,2465 v1(4450,2465) ; C242.2@4300,5765 v1(4379,5765) ; v1(4312.5,7737.5) 4312.5,7862.5 v1(4300,7875) ; v1(4500,6690) 4500,6704 4482,6722 ; v1(4537.5,5050) 4572.5,5085 C48.2@4625,5085 ; v1(4537.5,6777.5) C127.2@4450,6690 ; v1(4622.5,8135) 4586.25,8098.75 C274.2@4550,8135 4635,8050 4769,8050 ; C39.2@4625,5760 4729,5760 v1(4741.5,5747.5) ; v1(4675,3325) R85.1@4675,3165 ; v1(4725,3205) 4720,3200 4710,3200 4710,3137.5 4702.5,3137.5 ; v1(4743,7900) 4750,7907 4750,8050 4769,8050 ; v1(4837.5,2915) C88.2@4900,2915 ; v1(4837.5,3137.5) 4702.5,3137.5 ; v1(4850,2335) C50.2@4925,2335 ; R109.1@4875,4365 4924,4365 v1(4950,4339) ; C280.2@5025,6460 v1(5100,6460) ; C266.2@5025,7210 5262.5,7447.5 5262.5,7868.5 v1(5304,7910) ; v1(5154,3281) C166.2@5100,3335 5304,3539 v1(5304,3735) ; v1(5212.5,2151) 5212.5,2214 5333.5,2335 ; v1(5225,3901) C51.2@5225,4135 v1(5225,4056) ; C170.2@5225,7910 v1(5304,7910) ; v1(5311,2312.5) 5333.5,2335 ; R17.2@5425,5210 v1(5425,5131) ; v1(5525,6050) C223.2@5525,6285 ; v1(5562.5,6660) C83.2@5625,6660 ; v1(5612.5,2687.5) 5612.5,2825 5575,2862.5 5575,3025 v1(5600,3050) ; v1(5612.5,5750) 5570,5750 5555,5735 ; v1(5725,3925) C53.2@5725,4010 ; v1(5725,4637.5) C212.2@5725,4540 5677.5,4540 5625,4487.5 v1(5625,4110) ; C180.2@5825,7915 5854,7915 v1(5904,7965) ; v1(5927.5,4712.5) C181.2@5975,4760 v1(6050,4760) ; v1(5975,7710) C254.2@6150,7710 ; v1(6025,6975) 6112.5,6975 6112.5,7122.5 ; v1(6050,7260) C173.2@6150,7160 ; v1(6075,2671) 6075,2606.5 6125,2556.5 C61.2@6125,2440 6166.5,2440 v1(6204,2477.5) ; v1(6125,8025) 6162.5,8062.5 6162.5,8137.5 6150,8150 C104.2@6150,8260 ; C73.2@6150,5535 v1(6229,5535) ; v1(6150,6006) 6177,6033 C225.2@6150,6060 v1(6237.5,5972.5) ; v1(6250,2548) 6292,2590 R87.1@6300,2590 ; v1(6300,3986.5) 6200,4086.5 v1(6200,4440) ; C85.2@6350,4760 6315,4760 6312.5,4757.5 6312.5,4723 v1(6287.5,4698) 6225,4635.5 6225,4615 C299.2@6300,4540 ; R34.2@6450,5115 v1(6450,5300) ; R67.1@6475,8010 v1(6625,8010) ; C163.2@662.5,4235 C163.2@650,4235 C163.2@662.5,4235 ; C163.2@662.5,4235 C163.2@662.5,4248 ; C163.2@662.5,4235 C163.2@662.5,4248 ; C163.2@662.5,4248 v1(729,4248) C163.2@662.5,4248 ; R279.1@950,3190 v1(1012.5,3252.5) R279.1@950,3190 ; C261.2@975,5190 975,5244 ; C261.2@975,5190 975,5244 ; C261.2@975,5190 975,5244 ; 975,5244 v1(987.5,5256.5) 975,5244 ; 975,5244 1100,5369 1100,5465 C232.2@1025,5540 ; C202.2@1050,2610 v1(1050,2431) C202.2@1050,2610 ; C80.2@1100,3735 v1(975,3735) C80.2@1100,3735 ; R75.1@1275,5840 1334,5840 ; R75.1@1275,5840 1334,5840 ; R75.1@1275,5840 1334,5840 ; R75.1@1275,5840 1334,5840 ; 1334,5840 v1(1354,5860) ; 1334,5840 v1(1354,5860) ; 1334,5840 v1(1354,5860) ; 1334,5840 v1(1354,5860) ; C189.2@1550,3415 v1(1550,3494) ; C189.2@1550,3415 v1(1550,3494) ; C189.2@1550,3415 v1(1550,3494) ; C189.2@1550,3415 v1(1550,3494) ; 1666.5,4235 v1(1679,4247.5) 1666.5,4235 ; 1666.5,4235 C253.2@1600,4235 1666.5,4235 ; C119.2@1850,5615 C119.2@1850,5637.5 ; C119.2@1850,5615 C119.2@1850,5637.5 ; C119.2@1850,5615 C119.2@1850,5637.5 ; C119.2@1850,5637.5 C119.2@1872.5,5615 ; C119.2@1850,5637.5 C119.2@1872.5,5615 ; C119.2@1872.5,5615 v1(1916.5,5615) C119.2@1872.5,5615 ; R31.1@1875,2610 1914.5,2570.5 ; R31.1@1875,2610 1914.5,2570.5 ; 1914.5,2570.5 v1(1875,2531) 1914.5,2570.5 ; v1(1925,5118.5) C126.2@1925,5185 ; v1(1925,5118.5) C126.2@1925,5185 ; v1(1925,5118.5) C126.2@1925,5185 ; v1(2129,3335) C27.2@2050,3335 v1(2129,3335) ; v1(2129,3335) 2175,3381 2175,3442 2300,3567 2300,3710 2275,3735 ; C241.2@2200,4060 v1(2200,3981) C241.2@2200,4060 ; 2275,3735 C216.2@2100,3735 2275,3735 ; v1(2312.5,4865) R11.1@2225,4865 v1(2312.5,4865) ; v1(2415,3125) C134.2@2475,3185 ; v1(2415,3125) C134.2@2475,3185 ; v1(2415,3125) 2500,3040 ; v1(2415,3125) C134.2@2475,3185 ; 2500,2593.5 C191.2@2500,2635 ; 2500,2593.5 v1(2412.5,2506) 2500,2593.5 ; 2500,2593.5 C191.2@2500,2635 ; 2500,2593.5 C191.2@2500,2635 ; 2500,3040 R289.1@2500,3015 2500,3040 ; 2550,4235 C165.2@2500,4235 2550,4235 ; 2550,4235 v1(2625,4160) 2550,4235 ; R285.1@2900,4710 2949,4710 ; R285.1@2900,4710 2949,4710 ; R285.1@2900,4710 2949,4710 ; R285.1@2900,4710 2949,4710 ; 2949,4710 v1(2979,4740) ; 2949,4710 v1(2979,4740) ; 2949,4710 v1(2979,4740) ; 2949,4710 v1(2979,4740) ; v1(2950,5581) C193.2@2950,5660 ; v1(2950,5581) C193.2@2950,5660 ; v1(2950,5581) C193.2@2950,5660 ; v1(2950,5581) C193.2@2950,5660 ; C287.2@3000,2235 v1(3000,2156) C287.2@3000,2235 ; 3001,4615 R30.1@3200,4615 3001,4615 ; 3001,4615 v1(2971,4585) 3001,4615 ; 3041.5,2635 v1@3054,2622.5 ; 3041.5,2635 C291.2@3000,2635 3041.5,2635 ; 3041.5,2635 v1@3054,2622.5 ; v1@3054,2622.5 v1(3066.5,2622.5) v1@3054,2622.5 ; R116.1@3525,4710 R116.1@3543.25,4691.75 ; R116.1@3525,4710 R116.1@3543.25,4691.75 ; R116.1@3543.25,4691.75 3662.5,4811 3662.5,5022.5 ; 3579,6735 C130.2@3550,6735 3579,6735 ; 3579,6735 v1(3604,6760) 3579,6735 ; C55.2@3625,5060 3662.5,5022.5 ; C55.2@3625,5060 3662.5,5022.5 ; C55.2@3625,5060 3662.5,5022.5 ; C123.2@3900,8165 3975,8090 ; C123.2@3900,8165 3975,8090 ; 3975,8090 3975,7950 4140,7950 R66.1@4200,7890 ; R123.1@4075,4615 4110,4615 ; R123.1@4075,4615 4110,4615 ; R123.1@4075,4615 4110,4615 ; 4110,4615 4152.5,4572.5 ; 4110,4615 4152.5,4572.5 ; 4152.5,4572.5 v1(4179,4572.5) 4152.5,4572.5 ; R77.1@4200,6915 v1@4269,6915 ; R77.1@4200,6915 v1@4269,6915 ; R77.1@4200,6915 v1@4269,6915 ; R66.1@4200,7890 4261.5,7890 ; R66.1@4200,7890 4261.5,7890 ; 4261.5,7890 4276.5,7875 ; 4261.5,7890 4276.5,7875 ; v1@4269,6915 v1(4279,6925) ; v1@4269,6915 v1(4279,6925) ; v1@4269,6915 v1(4279,6925) ; 4276.5,7875 v1(4300,7875) ; 4276.5,7875 v1(4300,7875) ; v1(4279,6925) 4482,6722 ; C127.2@4450,6690 4482,6722 ; C127.2@4450,6690 4482,6722 ; C161.2@4500,7265 v1(4500,7344) C161.2@4500,7265 ; C161.2@4500,7265 C60.2@4500,7585 ; C60.2@4500,7585 v1(4500,7518.5) C60.2@4500,7585 ; C48.2@4625,5085 4704,5085 ; C48.2@4625,5085 4704,5085 ; R85.1@4675,3165 4702.5,3137.5 ; R85.1@4675,3165 4702.5,3137.5 ; 4704,5085 v1(4716.5,5097.5) 4704,5085 ; 4769,8050 C195.1@4825,8106 4769,8050 ; C88.2@4900,2915 v1(4966.5,2915) C88.2@4900,2915 ; v1(5304,3735) C106.2@5225,3735 v1(5304,3735) ; v1(5304,7910) 5325,7910 5350,7935 5350,8115 5425,8190 R63.1@5525,8190 ; 5333.5,2335 C196.2@5375,2335 5333.5,2335 ; v1(5425,5131) 5600,5306 ; v1(5425,5131) 5600,5306 ; C223.2@5525,6285 v1(5604,6285) C223.2@5525,6285 ; R63.1@5525,8190 v1(5525,8319) R63.1@5525,8190 ; 5555,5735 5555,5545 v1(5600,5500) ; 5555,5735 C112.2@5525,5735 5555,5735 ; 5579,7235 C46.2@5525,7235 5579,7235 ; 5579,7235 v1(5616.5,7197.5) 5579,7235 ; v1(5600,3050) 5640,3050 ; v1(5600,3050) 5640,3050 ; 5600,5306 v1(5600,5500) ; 5600,5306 v1(5600,5500) ; v1(5625,4110) C53.2@5725,4010 ; v1(5625,4110) C53.2@5725,4010 ; 5640,3050 C214.2@5675,3085 ; 5640,3050 C214.2@5675,3085 ; C214.2@5675,3085 5750,3160 5750,3560 C90.2@5675,3635 ; C90.2@5675,3635 5706.25,3603.75 ; C90.2@5675,3635 5706.25,3603.75 ; 5706.25,3603.75 v1(5737.5,3635) 5706.25,3603.75 ; 5735,2235 v1(5662.5,2162.5) 5735,2235 ; 5735,2235 C264.2@5825,2235 5735,2235 ; v1(6112.5,6754) 6150,6716.5 ; v1(6112.5,6754) 6112.5,7122.5 ; v1(6112.5,6754) 6150,6716.5 ; 6112.5,7122.5 C173.2@6150,7160 ; 6112.5,7122.5 C173.2@6150,7160 ; 6150,6716.5 R62.1@6150,6690 6150,6716.5 ; C254.2@6150,7710 v1(6071,7710) C254.2@6150,7710 ; v1(6200,4440) C299.2@6300,4540 ; v1(6200,4440) C299.2@6300,4540 ; v1(6600,6781) R112.1@6600,6860 ; v1(6600,6781) R112.1@6600,6860 ; v1(6600,6781) R112.1@6600,6860 ; C244.2@650,3335 v1(729,3335) C244.2@650,3335 ; R12.1@1600,5035 v1(1675,5110) R12.1@1600,5035 ; v1(2444,2179) C164.2@2500,2235 v1(2444,2179) ; v1(4962.5,6835) C38.2@5025,6835 v1(4962.5,6835) ; C143.2@5075,2785 v1(5154,2785) C143.2@5075,2785 ; v1(5150,5740) C70.2@5225,5740 v1(5150,5740) ; v1(6300,3018.5) C213.2@6300,3085 v1(6300,3018.5) ; v1(6300,3556) C186.2@6300,3635 v1(6300,3556) ; C258.2@6600,6390 v1(6600,6469) C258.2@6600,6390
  other v1: 5212.5,2151 3000,2156 5662.5,2162.5 2444,2179 6250,2198 5525,2408.5 1050,2431 2412.5,2506 1875,2531 6250,2548 6250,2548 3066.5,2622.5 4475,2723 5154,2785 4966.5,2915 6300,3018.5 5600,3050 1450,3109 2415,3125 3800,3151 1012.5,3252.5 4499,3325 729,3335 1550,3494 1550,3494 6300,3556 5737.5,3635 975,3735 4824,3975 2200,3981 6300,3986.5 2625,4160 1800,4176 729,4248 1679,4247.5 6600,4326 1925,4456 4699,4550 4699,4550 4179,4572.5 2971,4585 6287.5,4698 2979,4740 2979,4740 6050,4760 757,4875 3012.5,4901 3925,5001 4716.5,5097.5 1675,5110 1925,5118.5 1925,5118.5 5425,5131 5425,5131 2500,5249 2975,5249 987.5,5256.5 5975,5511.5 2950,5581 2950,5581 2950,5581 1916.5,5615 3225,5626 5150,5740 4741.5,5747.5 2327,5850 1354,5860 1354,5860 1354,5860 1460.5,5862.5 1900,6068 2475,6242 2925,6250 5604,6285 6600,6469 6112.5,6754 3604,6760 6600,6781 6600,6781 2894.5,6825 4962.5,6835 1375,6850 4279,6925 5616.5,7197.5 4500,7344 4500,7518.5 6071,7710 4743,7900 5304,7910 5304,7910 2819.5,7987.5 5525,8319
GND1: J4.31 U6.40 U11.38 U32.25 U40.37 U113.18 U116.32 | length 17196.4
  TopLayer w10: U6.40@725,4565 v1(725,4650) ; U40.37@4190,7750 v1(4275,7750) ; U32.25@5215,7800 v1(5300,7800) ; 3875,5537.5 v1(3862.5,5550) 3875,5537.5 ; 3875,5537.5 U116.32@3875,5440 3875,5537.5 ; 5235,5477.5 5237.5,5475 ; 5235,5477.5 U113.18@5235,5500 ; 5235,5477.5 U113.18@5235,5500 ; 5235,5477.5 5237.5,5475 ; 5235,5477.5 U113.18@5235,5500 ; 5235,5477.5 5237.5,5475 ; 5237.5,5475 v1(5320,5475) ; 5237.5,5475 v1(5320,5475) ; 5237.5,5475 v1(5320,5475) ; U11.38@1615,4675 v1(1700,4675) U11.38@1615,4675
  MidLayer1 w10: v1(5137.5,7800) 5312.5,7625 ; v1(5300,7800) 5312.5,7787.5 5231.25,7706.25 5312.5,7625 ; 5262.5,5532.5 5262.5,6662.5 ; 5262.5,5532.5 v1(5320,5475) 5262.5,5532.5 ; 5262.5,5532.5 5262.5,6662.5 ; 5262.5,6662.5 5312.5,6712.5 ; 5262.5,6662.5 5312.5,6712.5 ; 5312.5,6712.5 5312.5,7625 ; 5312.5,6712.5 5312.5,7625
  MidLayer2 w10: v1(3862.5,5550) 4000,5687.5 4250,5687.5 4287.5,5650 4612.5,5650 4675,5712.5 5225,5712.5 5248,5689.5 5325,5689.5 5337.5,5677 5337.5,5652 5275,5589.5 5275,5520 v1(5320,5475)
  MidLayer5 w10: v1(1700,4675) 1912.5,4675 2212.5,4975 3287.5,4975 v1(3862.5,5550) ; v1(4275,7750) 4512.5,7987.5 5000,7987.5 5137.5,7850 v1(5137.5,7800)
  MidLayer6 w10: v1(725,4650) 687.5,4687.5 687.5,4806 725,4843.5 837.5,4843.5 917,4923 1437.5,4923 1685.5,4675 v1(1700,4675) ; 2675,8675 2862.5,8675 ; 2675,8675 J4.31@2550,8800 2675,8675 ; 2675,8675 2862.5,8675 ; 2862.5,8675 3150,8387.5 ; 2862.5,8675 3150,8387.5 ; 3150,8300 3350,8100 ; 3150,8300 3150,8387.5 ; 3150,8300 3150,8387.5 ; 3150,8300 3350,8100 ; 3350,8100 4000,8100 ; 3350,8100 4000,8100 ; 4000,8100 4200,7900 ; 4000,8100 4200,7900 ; 4200,7775 4225,7750 ; 4200,7775 4200,7900 ; 4200,7775 4200,7900 ; 4200,7775 4225,7750 ; 4225,7750 v1(4275,7750) 4225,7750
  other v1: 1700,4675 5320,5475 5320,5475 3862.5,5550 4275,7750
HOG: U1.9 U87.10 | length 1126.9
  TopLayer w6: U1.9@2525,5942 2525,5987.5 2550,6012.5 2625,6012.5 2650,5987.5 2650,5900 2750,5800 2750,5687.5 2762.5,5675 2787.5,5675 2812.5,5700 2812.5,5950 2850,5987.5 3012.5,5987.5 3025,5975 U87.10@3025,5942
ISP4: U14.4 U92.10 U94.21 | length 8315.9
  TopLayer w6: v1(2950,7587.5) U94.21@2950,7665 ; v1(6562.5,5037.5) 6575,5050 U92.10@6575,5108 ; 2875,4116 v1(2862.5,4128.5) 2875,4116 ; 2875,4116 U14.4@2875,4067 2875,4116
  MidLayer1 w6: v1(2862.5,4128.5) 2862.5,4575 2900,4612.5 2900,4962.5 2834,5028.5 2834,5852 2887.5,5905.5 2887.5,6375 2825,6437.5 2825,7462.5 v1(2950,7587.5)
  MidLayer2 w6: v1(2862.5,4128.5) 2862.5,4200 2887.5,4225 3737.5,4225 3962.5,4450 4725,4450 4775,4500 4775,4737.5 4825,4787.5 6550,4787.5 6600,4837.5 6600,5000 v1(6562.5,5037.5)
  other v1: 2862.5,4128.5
ISPON: U16.5 U242.9 | length 6287.1
  TopLayer w6: U16.5@875,3592 v1(875,3650) ; v1(3800,7487.5) U242.9@3800,7558
  BottomLayer w6: v1(875,3650) 850,3625 637.5,3625 612.5,3650 612.5,4037.5 625,4050 675,4050 700,4075 700,4175 887.5,4362.5 887.5,4850 1437.5,5400 2175,5400 2437.5,5662.5 2437.5,6562.5 3200,7325 3637.5,7325 v1(3800,7487.5)
ISRSEL0: U39.10 U113.10 | length 2930.5
  TopLayer w6: U39.10@3075,5117 3075,5037.5 3100,5012.5 3237.5,5012.5 3250,5000 3250,4862.5 3275,4837.5 3350,4837.5 3375,4862.5 3375,4898.5 3350,4923.5 3350,5000 3362.5,5012.5 3550,5012.5 3587.5,4975 3587.5,4875 3612.5,4850 3800,4850 3825,4825 3825,4725 3837.5,4712.5 3958.5,4712.5 3971,4725 4037.5,4725 4162.5,4850 4437.5,4850 4587.5,5000 4587.5,5250 4650,5312.5 4800,5312.5 4825,5337.5 U113.10@4825,5440
ISRSEL1: U39.9 U113.11 | length 2622.1
  TopLayer w6: U39.9@3025,5117 3025,5150 3050,5175 3137.5,5175 3150,5162.5 3150,5075 3175,5050 3325,5050 3487.5,5212.5 3487.5,5500 3512.5,5525 3825,5525 3850,5500 3850,5387.5 3862.5,5375 4350,5375 4500,5525 4850,5525 4875,5500 U113.11@4875,5440
L0: U3.13 U246.12 | length 1788
  TopLayer w6: v1(800,2600) 837.5,2600 850,2612.5 U246.12@850,2660 ; U3.13@1200,3783 1200,3750 v1(1225,3725)
  MidLayer5 w6: v1(800,2600) 800,2837.5 675,2962.5 675,3437.5 687.5,3450 900,3450 1062.5,3612.5 1212.5,3612.5 1225,3625 v1(1225,3725)
L180: U3.14 U246.13 | length 1445.5
  TopLayer w6: v1(837.5,2750) 900,2687.5 U246.13@900,2660 ; U3.14@1150,3783 1150,3738 v1(1175,3713)
  BottomLayer w6: v1(837.5,2750) 837.5,3425 862.5,3450 1112.5,3450 1137.5,3475 1137.5,3550 1162.5,3575 1162.5,3700.5 v1(1175,3713)
LAST: U77.3 U94.7 U113.9 | length 6327.8
  TopLayer w6: v1(2662.5,8225) U94.7@2740,8225 ; U77.3@5425,4017 v1(5425,4087.5) ; 4775,5370.5 U113.9@4775,5440 4775,5370.5 ; 4775,5370.5 v1(4787.5,5358) 4775,5370.5
  MidLayer1 w6: v1(4787.5,5358) 4870.5,5275 4925,5275 5387.5,4812.5 5387.5,4312.5 5362.5,4287.5 5362.5,4125 5400,4087.5 v1(5425,4087.5)
  MidLayer4 w6: v1(2662.5,8225) 2662.5,7487.5 2850,7300 2850,6662.5 2875,6637.5 3087.5,6637.5 3375,6350 v1(3375,5862.5)
  MidLayer6 w6: v1(3375,5862.5) 3425,5812.5 3675,5812.5 3900,5587.5 4212.5,5587.5 4375,5425 4720.5,5425 v1(4787.5,5358)
  other v1: 4787.5,5358
M0: U3.3 U246.16 | length 1069.1
  TopLayer w6: U246.16@1050,2660 v1(1050,2737.5) ; U3.3@1150,3568 1150,3512.5 1162.5,3500 v1(1212,3500)
  MidLayer5 w6: v1(1050,2737.5) 1037.5,2750 1037.5,2962.5 1062.5,2987.5 1062.5,3375 1137.5,3450 1137.5,3475 1162.5,3500 v1(1212,3500)
M180: U3.4 U246.17 | length 1107.8
  TopLayer w6: U246.17@1100,2660 v1(1100,2739) ; U3.4@1200,3568 v1(1200,3642)
  MidLayer1 w6: v1(1100,2739) 1137.5,2776.5 1137.5,3150 1125,3162.5 1125,3567 v1(1200,3642)
MS0: U2.30 U11.15 | length 2827.4
  TopLayer w6: U2.30@690,7050 v1(750,7050) ; U11.15@2235,5025 v1(2325,5025)
  MidLayer4 w6: v1(750,7050) 1075,6725 1075,6537.5 1212.5,6400 1212.5,6375 1637.5,5950 1637.5,5725 2325,5037.5 v1(2325,5025)
MS1: U2.31 U11.35 | length 2685
  TopLayer w6: U2.31@690,7000 737.5,7000 v1(762.5,6975) ; U11.35@1615,4825 v1(1685,4825)
  MidLayer4 w6: v1(762.5,6975) 762.5,6925 1025,6662.5 1025,6550 1112.5,6462.5 1112.5,6375 1612.5,5875 1612.5,4897.5 v1(1685,4825)
N1: U15.2 U92.6 | length 4350.9
  TopLayer w6: v1(2525,5456) U15.2@2525,5517 ; U92.6@6525,4893 v1(6525,4963)
  MidLayer2 w6: v1(2525,5456) 2544,5475 2925,5475 3025,5375 3162.5,5375 3350,5187.5 6300.5,5187.5 v1(6525,4963)
N4: U87.13 U94.30 | length 2064.6
  TopLayer w10: U87.13@3175,5942 v1(3175,6007) ; U94.30@3360,7775 v1(3445,7775)
  MidLayer1 w10: v1(3333,6700) 3291,6742 3291,7191 3375,7275 3375,7705 v1(3445,7775)
  BottomLayer w10: v1(3175,6007) 3187.5,6019.5 3187.5,6060.5 3202,6075 3202,6162.5 3287.5,6248 3287.5,6612.5 3333,6658 v1(3333,6700)
N5: U91.1 U94.5 | length 6750.7
  TopLayer w6: U94.5@2850,8285 2850,8237.5 2862.5,8225 v1(2900,8225) ; U91.1@5625,2760 v1(5625,2975)
  MidLayer4 w6: v1(2900,8225) 2887.5,8212.5 2887.5,7975 2912.5,7950 2925,7950 3037.5,7837.5 3037.5,7425 3500,6962.5 3562.5,6962.5 3687.5,6837.5 3687.5,6662.5 3787.5,6562.5 3787.5,6437.5 3812.5,6412.5 3812.5,6087.5 3937.5,5962.5 3937.5,5937.5 4175,5700 4175,5475 4625,5025 4625,4975 4775,4825 4775,4250 5175,3850 5175,3637.5 5375,3437.5 5375,3287.5 5575,3087.5 5575,3025 v1(5625,2975)
N6: J4.46 U89.1 U94.4 | length 7955
  TopLayer w6: v1(2925,8000) 2925,8200 v1(2937.5,8212.5) ; U89.1@6175,2760 v1(6175,2837.5) ; U94.4@2900,8250 2922.5,8250 ; U94.4@2900,8250 U94.4@2900,8285 U94.4@2900,8250 ; U94.4@2900,8250 2922.5,8250 ; 2922.5,8250 2925,8247.5 ; 2922.5,8250 2925,8247.5 ; 2925,8225 v1(2937.5,8212.5) ; 2925,8225 2925,8247.5 ; 2925,8225 v1(2937.5,8212.5) ; 2925,8225 2925,8247.5
  MidLayer4 w6: v1(2925,8000) 3275,7650 3275,7450 3450,7275 3450,7262.5 3475,7237.5 3487.5,7237.5 3700,7025 3700,7012.5 3875,6837.5 3875,6100 4400,5575 4462.5,5575 4475,5562.5 4475,5512.5 4625,5362.5 4625,5325 4675,5275 4675,5075 4680.5,5069.5 4712.5,5069.5 4719.5,5062.5 4837.5,5062.5 5250,4650 5250,4225 5625,3850 5625,3612.5 6000,3237.5 6000,3012.5 v1(6175,2837.5)
  BottomLayer w6: v1(2937.5,8212.5) 3200,8475 3200,8850 J4.46@3250,8900
N7: U90.18 U260.7 U265.15 | length 5179.5
  TopLayer w6: U265.15@2550,2708 v1(2550,2775) ; U90.18@4400,3225 v1(4488,3225) ; v1(1600,2088) U260.7@1600,2165 v1(1600,2088)
  MidLayer5 w6: v1(2550,2775) 2543,2775 2318,2550 2150,2550 1875,2275 1875,2137.5 1825.5,2088 ; v1(4488,3225) 4363,3100 3712.5,3100 3462.5,2850 2875,2850 2850,2825 2850,2725 2725,2600 2637.5,2600 2612.5,2575 2612.5,2500 2587.5,2475 2362.5,2475 2212.5,2325 2212.5,2200 2187.5,2175 1962.5,2175 1875.5,2088 1850.5,2113 1825.5,2088 ; 1825.5,2088 v1(1600,2088) 1825.5,2088
  other v1: 1600,2088
N8: U94.28 U116.9 | length 1946.7
  TopLayer w6: v1(3300,7583) U94.28@3300,7665 ; U116.9@4125,6060 v1(4125,6125)
  MidLayer4 w6: v1(3300,7583) 3612.5,7270.5 3612.5,7162.5 3887.5,6887.5 3887.5,6362.5 v1(4125,6125)
N10: U9.4 U58.42 | length 4374.2
  TopLayer w6: U58.42@825,5540 825,5500 v1(862.5,5462.5) ; U9.4@4775,4942 v1(4775,5016)
  MidLayer2 w6: v1(862.5,5462.5) 925,5525 1275,5525 1437.5,5362.5 1625,5362.5 1687.5,5300 2259,5300 2421.5,5137.5 3825,5137.5 4000,4962.5 4462.5,4962.5 4479,4979 4637.5,4979 4654,4962.5 4721.5,4962.5 v1(4775,5016)
N11: U57.13 U58.13 U59.33 | length 3551.5
  TopLayer w6: U58.13@1285,5900 1425,5900 1500,5975 1837.5,5975 1912.5,5900 U57.13@2210,5900 v1(2275,5900) ; v1(4062.5,6975) U59.33@4190,6975
  MidLayer5 w6: v1(2275,5900) 2275,5937.5 2500,6162.5 3237.5,6162.5 3587.5,6512.5 3587.5,6575 3600,6587.5 3812.5,6587.5 4062.5,6837.5 v1(4062.5,6975)
N13: U114.6 U260.5 | length 4987.8
  TopLayer w6: U260.5@1540,2275 v1(1625,2275) ; U114.6@4350,4943 4350,5000 v1(4375,5025)
  MidLayer2 w6: v1(1625,2275) 1625,2312.5 1775,2462.5 1775,2550 2200,2975 3075,2975 3337.5,3237.5 4000,3237.5 v1(4287.5,3525)
  MidLayer3 w6: v1(4287.5,3525) 4400,3637.5 4400,5000 v1(4375,5025)
N14: U90.24 U263.2 | length 3458.7
  TopLayer w6: v1(1537.5,3637.5) 1550,3625 U263.2@1550,3567 ; U90.24@4625,3050 v1(4625,3139)
  MidLayer6 w6: v1(1537.5,3637.5) 1612.5,3562.5 4100,3562.5 4287.5,3375 4389,3375 v1(4625,3139)
N16: U15.4 U17.2 U18.5 | length 4385.9
  TopLayer w6: U18.5@1650,4092 1650,4137.5 v1(1700,4187.5) ; U17.2@3600,6942 v1(3600,7000) ; U15.4@2625,5517 v1(2625,5591) U15.4@2625,5517
  BottomLayer w6: v1(1700,4187.5) 1725,4212.5 1845,4212.5 2050,4417.5 2050,4800 2300,5050 2300,5278.5 2612.5,5591 v1(2625,5591) 2587.5,5628.5 2587.5,5818 2612.5,5843 2637.5,5843 2650,5855.5 2650,5900 2750,6000 2750,6025 2725,6050 2675,6050 2650,6075 2650,6100 2675,6125 2787.5,6125 2812.5,6150 2812.5,6262.5 2950,6400 2950,6437.5 3037.5,6525 3037.5,6662.5 3262.5,6887.5 3361.5,6887.5 3511.5,7037.5 3562.5,7037.5 v1(3600,7000)
  other v1: 2625,5591
N17: U218.12 U242.1 | length 5940.8
  TopLayer w6: v1(3550,7231) U242.1@3550,7342 ; U218.12@6500,3867 v1(6500,3937.5)
  MidLayer3 w6: v1(3550,7231) 3625,7156 3625,7000 3650,6975 3850,6975 3875,6950 3875,6587.5 4287.5,6175 4287.5,5825 4387.5,5825 4637.5,5575 4987.5,5575 5362.5,5200 5362.5,4450 5387.5,4425 5562.5,4425 5800,4662.5 6287.5,4662.5 6300,4650 6300,4600 6500,4400 v1(6500,3937.5)
N21: U218.2 U242.13 | length 5755.5
  TopLayer w6: v1(3600,7497) U242.13@3600,7558 ; v1(6550,4012.5) U218.2@6550,4083
  MidLayer6 w6: v1(3600,7497) 3600,7225 3625,7200 4300,7200 4825,6675 5304,6675 5629,6350 5900,6350 6025,6225 6025,6012.5 6600,5437.5 6600,4725 6650,4675 6650,4112.5 v1(6550,4012.5)
N22: U3.9 U5.3 U23.4 U246.18 | length 9365.3
  TopLayer w10: v1(1137.5,2725) 1150,2712.5 U246.18@1150,2660 ; U3.9@1400,3783 1400,3718.5 v1(1412.5,3706) ; U23.4@5675,5435 v1(5675,5512.5) ; U5.3@750,4092 750,4138 ; U5.3@750,4092 750,4138 ; U5.3@750,4092 750,4138 ; 750,4138 v1(762,4150) ; 750,4138 v1(762,4150) ; 750,4138 v1(762,4150)
  MidLayer4 w10: v1(762,4150) 762,3613 875,3500 875,3062.5 1137.5,2800 v1(1137.5,2725)
  MidLayer5 w10: v1(1412.5,3706) 1443.5,3706 1712.5,3975 2150,3975 2225,4050 2737.5,4050 2937.5,4250 3200,4250 3687.5,4737.5 3900,4737.5 4212.5,5050 4212.5,5100 4250,5137.5 4400,5137.5 4687.5,5425 5087.5,5425 5287.5,5625 5412.5,5625 5587.5,5800 5837.5,5800 5862.5,5775 5862.5,5700 v1(5675,5512.5)
  MidLayer6 w10: 1124.5,3787.5 v1(762,4150) 1124.5,3787.5 ; 1124.5,3787.5 1331,3787.5 ; 1124.5,3787.5 1331,3787.5 ; 1331,3787.5 v1(1412.5,3706) 1331,3787.5
  other v1: 1412.5,3706 762,4150 762,4150
N33: U116.43 U128.33 | length 2217.3
  TopLayer w6: U128.33@2815,6875 v1(2897,6875) ; v1(4100,5650) U116.43@4285,5650
  MidLayer6 w6: v1(2897,6875) 3050,6722 3050,6312.5 3412.5,5950 3800,5950 v1(4100,5650)
N34: U114.11 U260.15 | length 4649.2
  TopLayer w6: v1(1987.5,2225) 2000,2212.5 U260.15@2000,2165 ; v1(4325,5100) 4350,5125 U114.11@4350,5158
  MidLayer3 w6: v1(4137.5,3487.5) 4137.5,4450 4350,4662.5 4350,5075 v1(4325,5100)
  MidLayer5 w6: v1(1987.5,2225) 2000,2237.5 2000,2375 2125,2500 2287.5,2500 2387.5,2600 2537.5,2600 2712.5,2775 2712.5,2862.5 2787.5,2937.5 3225,2937.5 3600,3312.5 3962.5,3312.5 v1(4137.5,3487.5)
N35: U87.12 U116.28 U128.41 U130.1 U134.1 | length 4849.7
  TopLayer w6: v1(2925,6433) U128.41@2925,6515 ; v1(3650,3211) U134.1@3650,3290 3650,3237.5 3700,3237.5 3775,3312.5 4247.5,3312.5 4250,3310 U130.1@4250,3265 ; U87.12@3125,5942 v1(3125,6003.5) U87.12@3125,5942 ; U116.28@3665,5500 v1(3747,5500) U116.28@3665,5500
  MidLayer1 w6: v1(3650,3211) 3650,5403 v1(3747,5500)
  MidLayer4 w6: v1(2925,6433) 3112.5,6245.5 3112.5,6016 v1(3125,6003.5)
  MidLayer6 w6: v1(3125,6003.5) 3203.5,5925 3212.5,5925 3637.5,5500 v1(3747,5500)
  other v1: 3747,5500 3125,6003.5
N37: U126.2 U260.14 | length 1332.3
  TopLayer w6: U260.14@1950,2165 v1(1950,2247) ; U126.2@2100,3192 v1(2100,3266)
  MidLayer1 w6: v1(1950,2247) 2003,2300 2112.5,2300 2125,2312.5 2125,2737.5 2087.5,2775 2087.5,3253.5 v1(2100,3266)
N39: U138.9 U263.12 | length 3300.9
  TopLayer w6: U263.12@1600,3783 v1(1600,3912.5) ; U138.9@4425,3800 v1(4425,3887.5)
  MidLayer6 w6: v1(1600,3912.5) 1675,3837.5 2137.5,3837.5 2387.5,3587.5 2687.5,3587.5 2700,3600 4137.5,3600 v1(4425,3887.5)
N41: U95.11 U128.28 | length 5514
  TopLayer w6: v1(2875,7075) U128.28@2875,7135 ; U95.11@3500,2275 v1(3589,2275)
  MidLayer3 w6: v1(2875,7075) 2925,7025 2925,6537.5 2950,6512.5 2950,5675 2862.5,5587.5 2862.5,5387.5 2775,5300 2775,5225 2625,5075 2625,4225 2687.5,4162.5 2687.5,3975 2787.5,3875 2787.5,3700 3075,3412.5 3075,2962.5 3300,2737.5 3300,2564 v1(3589,2275)
N42: U128.24 U132.5 | length 5177.6
  TopLayer w6: v1(3075,7053) U128.24@3075,7135 ; U132.5@3200,2092 v1(3200,2162.5)
  MidLayer1 w6: v1(3075,7053) 3100,7028 3100,5850 3112.5,5837.5 3112.5,5787.5 3100,5775 3100,5200 3150,5150 3150,4225 3075,4150 3075,2712.5 3100,2687.5 3100,2487.5 3087.5,2475 3087.5,2393 3200,2280.5 v1(3200,2162.5)
N43: U113.33 U116.17 U128.29 | length 3166.4
  TopLayer w6: v1(2737.5,7075) U128.29@2815,7075 ; v1(3700,6137.5) 3725,6137.5 U116.17@3725,6060 3725,6187.5 3750,6212.5 4862.5,6212.5 4975,6100 U113.33@4975,6060
  MidLayer6 w6: v1(2737.5,7075) 3087.5,6725 3387.5,6725 3400,6712.5 3400,6562.5 3537.5,6425 3537.5,6300 v1(3700,6137.5)
N46: U47.9 U48.9 | length 812.2
  TopLayer w6: U48.9@5375,6533 5375,6500 5412.5,6462.5 v1(5425,6462.5) ; v1(5975,6687.5) U47.9@5975,6758
  MidLayer5 w6: v1(5425,6462.5) 5525,6562.5 5750,6562.5 5837.5,6650 5937.5,6650 v1(5975,6687.5)